# Altium PCB UI_PCB.PcbDoc (part 3 of 5)
Units mm, origin at the board's own origin, x right, y up, seen from the top; angles counter-clockwise.
Board outline 164.97 x 129.99 mm, 4 copper layers (SIG/PWR1, GND1, GNS2, SIG/PWR2), stack 1.18 mm thick; 237 components, 216 nets, 913 pads, 655 vias.
Unrouted connection lines stored in the file: 177.
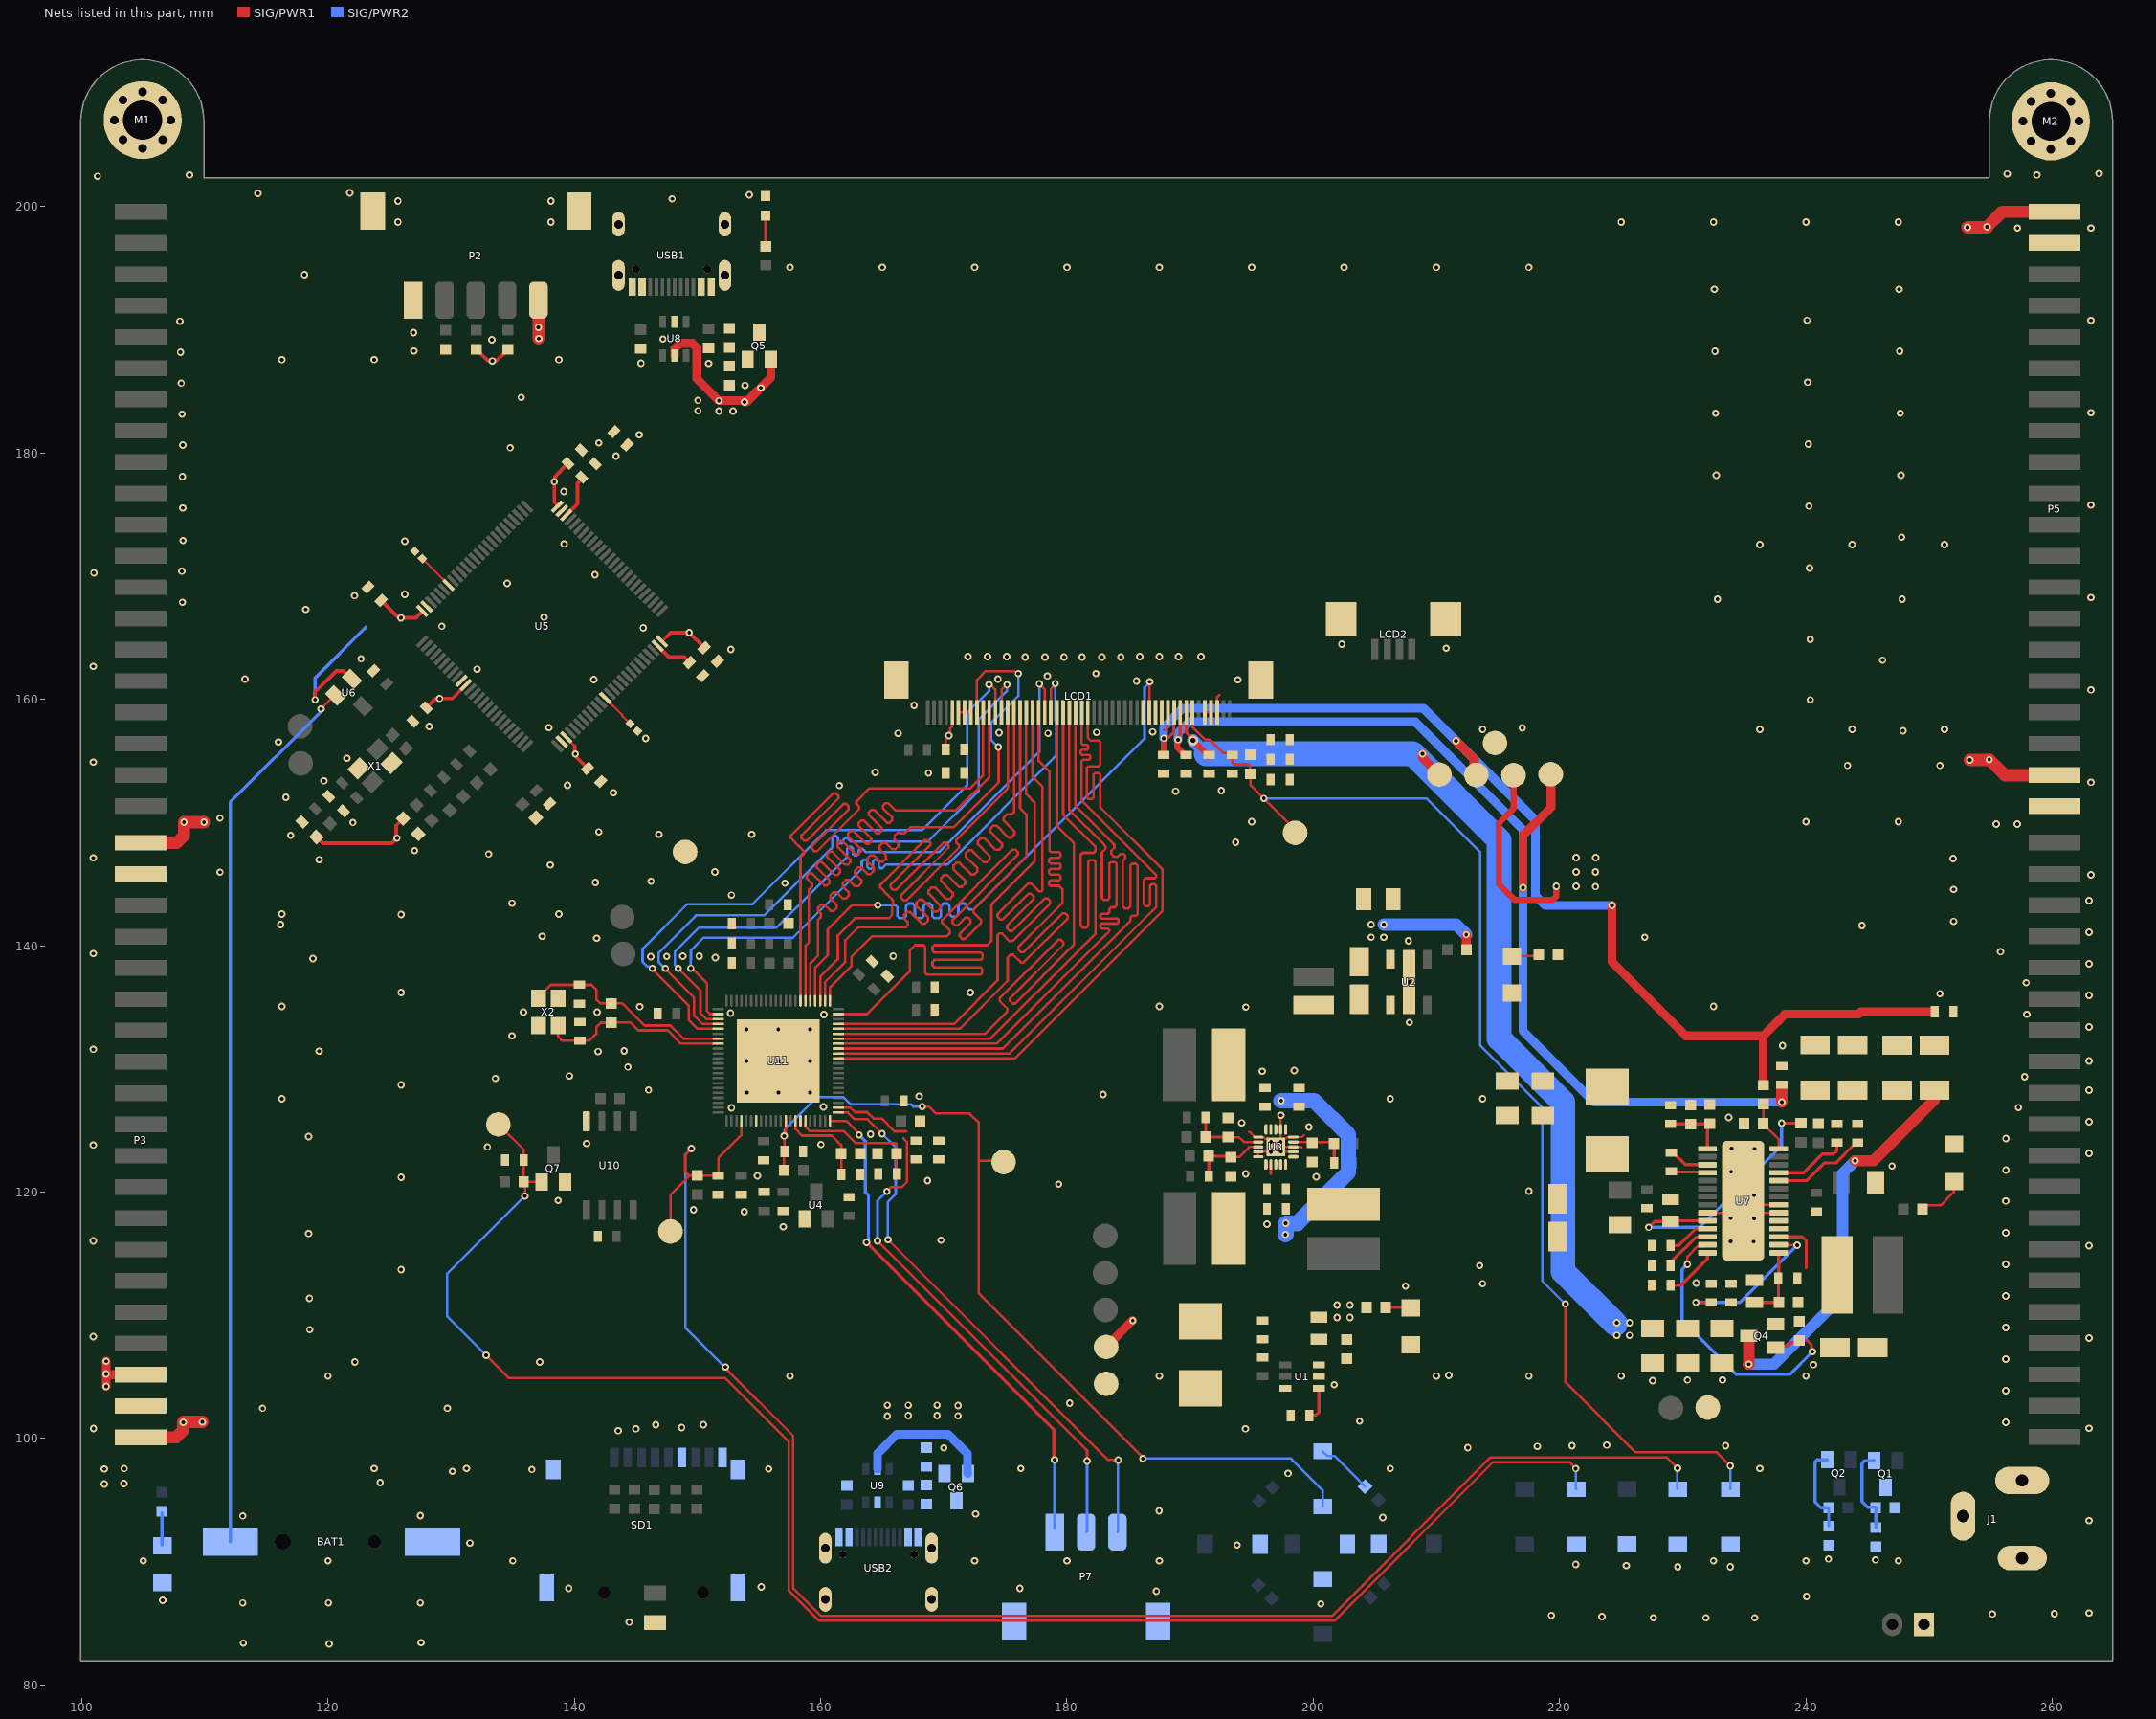
[diagram p4: the nets of this part, all layers, seen from the top]

## Via types
v1: diameter 0.6, hole 0.3, SIG/PWR1 to SIG/PWR2, tented both sides, 644 vias
v2: diameter 0.6, hole 0.3, SIG/PWR1 to SIG/PWR2, tented bottom, 10 vias
v3: diameter 0.8, hole 0.4, SIG/PWR1 to SIG/PWR2, tented both sides, 1 vias

## Nets (pads, with @x,y where several pads share a name; then routed paths per layer and width w, separated by ;. In a path a pad name is that pad's centre, name@x,y a point inside that pad or via, vN(x,y) a via of type N, cw(c..) or ccw(c..) an arc to the next point about the centre after c; other vN are vias at no path point) (continued)
"3V3 LCD": C14.2 C15.2 C16.2 C17.2 C18.2 C19.2 C45.2 C48.2 C49.2 C54.2 C55.2 C56.2 C57.2 C58.2 L7.2 LCD1.6 LCD1.7 LCD1.8 LCD1.39 LCD1.46 LCD1.47 P2.5 P3.01 P3.20 P5.02 P5.20 R14.1 R16.1 R20.2 R22.1 R29.1 R37.2 R40.2 TP10.1 U5.11 U5.28 U5.50 U5.75 U5.100 U6.1 | length 91.7
  SIG/PWR1 w0.2: U5.28@139.333,156.923 140.034,156.222 ; U5.50@147.111,164.701 147.511,165.1 ; LCD1.6@171.192,158.953 LCD1.7@171.692,158.953 LCD1.8@172.192,158.953 ; LCD1.46@191.192,158.953 LCD1.47@191.692,158.953
  SIG/PWR1 w0.254: v1(129.057,160.07) 130.098,160.07 U5.11@131.193,161.165
  SIG/PWR1 w0.308: R20.2@118.839,149.004 118.934,149.004 119.602,148.336 125.197,148.336 v1(125.603,148.742) 125.552,148.793 125.552,149.784 R22.1@126.096,150.328 ; v1(118.948,159.969) 118.948,160.604 120.675,162.331 121.211,162.331 121.87,161.673 U6.1@121.941,161.673 ; C18.2@124.313,168.041 125.674,166.68 125.859,166.68 v1(125.915,166.624) 127.114,166.624 U5.100@127.666,167.176 ; C14.2@127.971,159.314 127.996,159.314 128.696,160.014 129.002,160.014 v1(129.057,160.07) ; U5.11@131.197,161.165 U5.11@131.201,161.165 ; R14.1@132.055,188.417 132.08,188.417 132.351,188.146 132.351,188.121 132.941,187.53 133.297,187.53 v1(133.35,187.477) 133.406,187.533 133.711,187.533 134.299,188.121 134.299,188.146 134.57,188.417 R16.1@134.595,188.417 ; P2.5@137.084,192.411 P2.5@137.096,192.398 ; v1@137.096,189.309 v1(137.109,189.296) ; U5.75@138.626,175.661 138.681,175.716 138.681,175.724 138.373,176.032 v1(138.373,177.673) 138.416,177.717 138.416,178.091 C17.2@139.491,179.166 ; v1@140.034,155.622 140.034,156.222 ; v1(140.081,155.575) 140.137,155.519 140.137,155.341 C15.2@141.066,154.412 ; 147.511,165.1 147.841,165.43 v1(149.327,165.43) 149.327,165.417 150.54,164.204 C16.2@150.54,164.191 ; P5.02@260.172,153.848 P5.02@260.198,153.873
  SIG/PWR1 w0.512: TP10.1@216.256,153.848 216.256,151.13 215.062,149.936 215.062,145.009 216.332,143.739 219.435,143.739 219.735,144.039 v1(219.735,144.831)
  SIG/PWR1 w1: P3.20@104.8,100.101 107.669,100.101 108.255,100.687 v1(108.255,101.321) ; P3.01@104.8,148.361 107.72,148.361 108.306,148.947 v1(108.306,150.038) v1(109.931,150.038) ; v1@108.255,101.346 v1(109.804,101.346) ; v1@137.096,189.309 P2.5@137.096,192.398 ; v1(253.111,198.323) v1@254.711,198.323 ; v1(253.314,155.092) v1@254.889,155.092 ; v1(254.711,198.374) 255.93,199.593 P5.20@260.198,199.593 ; v1(254.889,155.118) 256.159,153.848 P5.02@260.172,153.848
  SIG/PWR2 w0.308: v1(118.948,159.969) 118.948,161.747 123.068,165.867
  other v1: 222.91,144.805 221.336,144.831 221.336,145.999 222.91,145.999 221.336,147.168 222.936,147.168 176.606,163.449 178.206,163.449 179.756,163.449 181.229,163.449 182.829,163.449 184.379,163.449 171.958,163.474 173.558,163.474 175.108,163.474 185.903,163.474 187.503,163.474 189.052,163.474 190.881,163.474 143.383,179.756 145.263,181.483 137.084,190.211
5V: C2.2 C6.2 C10.2 C11.2 C13.2 L1.2 P3.18 Q5.2 Q6.2 R1.2 R28.1 TP6.1 U3.7 U3.8 U3.9 U3.10 U3.16 U3.18 U3.19 U8.5 U9.5 | length 51.8
  SIG/PWR1 w0.198: 196.552,121.482 U3.7@196.552,122.248
  SIG/PWR1 w0.712: v1(101.981,104.242) v1(101.981,105.245) ; v1(101.981,106.274) v1(101.981,105.245) ; P3.18@104.8,105.181 102.044,105.181 v1(101.981,105.245) ; U8.5@148.133,187.916 148.133,188.449 148.594,188.911 149.572,188.911 149.945,188.537 149.945,186.046 v1(151.74,184.252) 153.721,184.252 v1(153.822,184.15) 153.975,184.15 155.948,186.123 155.948,187.604 Q5.2@155.966,187.622 ; TP6.1@183.185,107.442 v1@185.318,109.576
  SIG/PWR2 w0.712: U9.5@164.617,97.53 164.617,98.781 166.192,100.355 170.332,100.355 171.926,98.762 171.926,97.205 Q6.2@171.968,97.163
  SIG/PWR2 w1.27: v1(197.383,127.432) 200.076,127.432 202.844,124.663 202.844,121.615 198.704,117.475 v1(197.764,117.475) 197.764,116.586 v1(197.739,116.561)
  other v1: 101.829,96.317 103.429,96.342 101.829,97.536 103.454,97.561 165.415,101.821 171.155,101.846 167.117,101.872 169.454,101.872 171.155,102.684 165.415,102.71 167.117,102.71 169.454,102.71 185.344,109.576 201.93,109.83 202.971,109.83 201.93,110.846 202.971,110.846 151.74,183.413 152.883,183.413 150.038,183.439 150.038,184.277 155.143,185.293
9V: J1.1 Q1.3 R2.2
10.4V: C3.2 C32.2 C33.2 C34.2 C51.2 D1.1 D4.2 LCD1.43 Q4.3 R5.2 TP8.1 U2.5 | length 118.3
  SIG/PWR1 w0.254: LCD1.43@189.692,158.953 189.692,157.323 190.236,156.779 v3(190.236,156.668)
  SIG/PWR1 w0.508: v3(190.236,156.668) 190.241,156.668 191.406,155.503 C51.2@191.406,155.499
  SIG/PWR1 w0.712: C51.2@191.406,155.499 C51.2@191.541,155.499 ; v1(208.864,155.6) 208.864,155.27 TP8.1@210.236,153.899 ; v1(212.42,140.919) 212.42,139.7 R5.2@212.446,139.675
  SIG/PWR1 w0.912: Q4.3@235.349,108.331 235.356,108.323 v1(235.356,106.045) ; v1(243.992,122.555) 245.493,122.555 250.394,127.457
  SIG/PWR2 w0.912: v1(235.356,106.045) 237.414,106.045 242.976,111.608 242.976,121.539 v1(243.992,122.555)
  SIG/PWR2 w1: v3(190.236,156.668) 191.304,155.6 ; v1(205.715,141.732) 211.607,141.732 v1(212.42,140.919)
  SIG/PWR2 w2: 191.304,155.6 208.077,155.6 215.087,148.59 215.087,132.486 220.269,127.305 220.269,113.563 v1@224.536,109.296
  other v1: 224.638,108.382 225.679,108.382 224.638,109.398 225.679,109.398 204.699,140.691 205.715,140.691 204.699,141.732
16V: C40.2 C52.2 D6.1 LCD1.41 R33.2 TP9.1 | length 93.7
  SIG/PWR1 w0.254: v1(187.858,156.845) 187.925,156.911 188.229,156.911 188.669,157.351 188.669,158.08 188.692,158.103 LCD1.41@188.692,158.953
  SIG/PWR1 w0.508: C52.2@187.858,155.499 v1(187.858,156.845)
  SIG/PWR1 w0.712: v1(211.582,156.642) 213.042,155.182 213.042,154.065 TP9.1@213.233,153.873 ; v1(224.257,143.281) 224.257,138.684 230.251,132.69 236.537,132.69 ; R33.2@236.537,128.689 236.537,132.69 ; C40.2@250.445,134.645 244.456,134.645 244.257,134.446 238.294,134.446 237.65,133.803 237.646,133.803 237.113,133.27 237.113,133.266 236.537,132.69
  SIG/PWR2 w0.712: v1(187.858,156.845) 187.858,157.759 189.382,159.283 208.94,159.283 v1(211.582,156.642) 218.035,150.189 218.035,144.078 218.832,143.281 v1(224.257,143.281)
-7V: C41.1 C53.2 D5.2 LCD1.42 R34.2 TP11.1 | length 87.5
  SIG/PWR1 w0.254: v1(189.013,156.732) 189.079,156.798 189.079,157.067 189.192,157.18 LCD1.42@189.192,158.953
  SIG/PWR1 w0.508: v1(189.013,156.732) 189.013,156.707 188.943,156.637 188.943,156.112 189.48,155.575 189.532,155.575 C53.2@189.582,155.525
  SIG/PWR1 w0.712: v1(217.018,144.729) 217.018,148.946 219.304,151.232 TP11.1@219.304,153.924
  SIG/PWR1 w0.912: v1(238.049,127.305) C41.1@238.049,128.498
  SIG/PWR2 w0.712: v1@189.009,156.732 189.009,157.259 189.941,158.191 208.276,158.191 217.018,149.45 v1(217.018,144.729) 217.018,133.096 222.809,127.305 v1(238.049,127.305)
B0: LCD1.12 U11.49 | length 53.5
  SIG/PWR1 w0.2: v1(146.329,138.164) 146.329,138.1 149.276,135.153 149.276,133.985 150.001,133.259 U11.49@151.688,133.259 ; v1(173.668,161.206) 173.772,161.206 174.144,160.834 174.192,160.834 LCD1.12@174.192,158.953
  SIG/PWR2 w0.2: v1(146.329,138.164) 146.221,138.164 146.076,138.309 145.925,138.309 145.542,138.693 145.542,139.751 149.174,143.383 154.457,143.383 160.458,149.384 168.231,149.384 171.907,153.06 171.907,158.953 173.69,160.736 173.69,161.184 v1(173.668,161.206)
B1: LCD1.13 U11.48 | length 53.5
  SIG/PWR1 w0.2: v1(147.396,138.164) 147.396,138.125 149.733,135.788 149.733,134.344 150.418,133.659 U11.48@151.688,133.659 ; LCD1.13@174.693,158.877 174.693,160.793 175.101,161.2 v1(175.121,161.2)
  SIG/PWR2 w0.2: v1(147.396,138.164) 147.357,138.164 146.85,138.671 146.85,139.433 149.885,142.469 155.423,142.469 160.846,147.892 160.946,147.992 160.946,148.773 161.083,148.909 161.264,148.909 161.4,148.773 161.4,148.446 161.537,148.31 161.718,148.31 161.854,148.446 161.854,148.599 161.991,148.735 162.172,148.735 162.308,148.599 162.445,148.463 164.547,148.463 164.821,148.463 164.973,148.463 168.707,148.463 172.847,152.603 172.847,158.394 175.124,160.672 175.124,161.197 v1(175.121,161.2)
B2: LCD1.14 U11.25 | length 56.3
  SIG/PWR1 w0.2: U11.25@159.963,135.534 159.963,137.484 161.392,138.913 161.392,140.843 162.789,142.24 165.532,142.24 165.811,142.519 165.811,143.383 165.824,143.396 165.895,143.466 165.895,143.679 165.576,143.997 165.47,144.103 164.834,144.739 164.834,144.951 168.478,148.595 168.69,148.595 168.902,148.383 168.902,148.171 165.682,144.951 165.682,144.739 165.895,144.527 166.107,144.527 169.963,148.383 170.175,148.383 170.387,148.171 170.387,147.959 166.531,144.103 166.531,143.891 166.743,143.679 166.955,143.679 171.236,147.959 171.236,148.171 171.024,148.383 171.024,148.595 171.094,148.666 175.192,152.764 LCD1.14@175.192,158.953
B3: LCD1.15 U11.24 | length 56.4
  SIG/PWR1 w0.2: U11.24@160.363,135.534 160.363,137.049 162.001,138.688 162.001,140.462 163.043,141.503 166.758,141.503 166.9,141.503 167.077,141.68 167.077,141.931 166.764,142.243 166.764,142.494 167.014,142.744 167.265,142.744 168.22,141.788 168.471,141.788 168.721,142.039 168.721,142.289 167.765,143.244 167.765,143.495 168.016,143.745 168.266,143.745 169.221,142.79 169.472,142.79 169.722,143.04 169.722,143.29 168.767,144.246 168.767,144.496 169.017,144.746 169.267,144.746 170.223,143.791 170.473,143.791 170.723,144.041 170.723,144.291 169.768,145.247 169.768,145.497 170.018,145.748 170.268,145.748 171.224,144.792 171.474,144.792 171.725,145.042 171.725,145.293 170.769,146.248 170.769,146.498 171.019,146.749 171.27,146.749 172.225,145.793 172.475,145.793 172.726,146.044 172.726,146.294 171.77,147.249 171.77,147.5 172.021,147.75 172.271,147.75 173.226,146.794 173.477,146.794 173.727,147.045 173.727,147.295 172.771,148.251 172.771,148.501 173.022,148.751 173.272,148.751 174.228,147.796 174.478,147.796 174.728,148.046 174.728,148.296 173.773,149.252 173.773,149.502 174.023,149.752 174.273,149.752 175.229,148.797 175.479,148.797 175.73,149.047 175.73,149.298 174.862,150.165 174.862,150.415 175.112,150.666 175.515,150.666 175.692,150.843 175.692,151.099 LCD1.15@175.692,158.953
B4: LCD1.16 U11.23 | length 56.3
  SIG/PWR1 w0.2: U11.23@160.763,135.534 160.763,136.639 162.484,138.361 162.484,139.09 164.16,140.767 170.231,140.767 170.421,140.957 170.492,141.028 170.492,141.24 169.856,141.876 169.856,142.089 175.587,147.82 175.799,147.82 176.011,147.608 176.011,147.395 170.704,142.089 170.704,141.876 170.916,141.664 171.128,141.664 171.765,142.301 171.977,142.301 172.189,142.089 172.189,141.877 171.296,140.984 171.296,140.772 171.509,140.56 171.721,140.56 173.037,141.877 173.037,142.089 172.401,142.725 172.401,142.937 176.436,146.972 176.613,147.149 176.733,147.269 176.733,150.622 176.192,151.163 LCD1.16@176.192,158.953
B5: LCD1.17 U11.21 | length 56.3
  SIG/PWR1 w0.2: U11.21@161.438,134.459 163.771,134.459 167.234,137.922 167.234,139.624 167.665,140.056 168.235,140.056 168.335,140.056 168.485,139.906 168.485,137.806 168.635,137.656 172.963,137.656 173.113,137.806 173.113,138.106 172.963,138.256 169.235,138.256 169.085,138.406 169.085,138.706 169.235,138.856 173.007,138.856 173.157,139.006 173.157,139.306 173.007,139.456 169.235,139.456 169.085,139.606 169.085,139.906 169.235,140.056 173.257,140.056 173.533,140.056 173.863,140.386 173.863,143.358 177.368,146.863 177.368,151.638 176.692,152.314 LCD1.17@176.692,158.953
B6: LCD1.18 U11.19 | length 56.3
  SIG/PWR1 w0.2: U11.19@161.438,133.659 170.82,133.659 174.371,137.211 174.371,140.868 174.438,140.935 174.509,141.006 174.721,141.006 175.357,140.37 175.569,140.37 178.632,143.432 178.632,143.644 178.42,143.856 178.208,143.856 175.569,141.218 175.357,141.218 175.145,141.43 175.145,141.643 177.296,143.794 177.296,144.006 177.084,144.218 176.872,144.218 174.791,142.137 174.579,142.137 174.367,142.349 174.367,142.561 176.872,145.066 177.084,145.066 177.72,144.43 177.932,144.43 178.003,144.501 178.003,152.908 177.192,153.719 LCD1.18@177.192,158.953
B7: LCD1.19 U11.18 | length 56.3
  SIG/PWR1 w0.2: U11.18@161.438,133.259 171.283,133.259 175.184,137.16 175.184,139.04 175.349,139.205 175.42,139.275 175.632,139.275 176.268,138.639 176.48,138.639 180.065,142.223 180.065,142.435 179.852,142.648 179.64,142.648 176.48,139.488 176.268,139.488 176.056,139.7 176.056,139.912 179.363,143.219 179.54,143.396 179.629,143.485 179.629,144.602 179.46,144.771 179.36,144.871 178.666,144.871 178.552,144.985 178.552,145.212 178.666,145.325 179.364,145.325 179.478,145.439 179.478,145.666 179.364,145.779 178.666,145.779 178.552,145.893 178.552,146.12 178.666,146.233 179.364,146.233 179.478,146.347 179.478,146.574 179.364,146.687 178.666,146.687 178.552,146.801 178.552,147.028 178.666,147.141 179.36,147.141 179.474,147.255 179.474,147.482 179.36,147.595 178.705,147.595 178.587,147.712 178.587,148.398 178.587,154.102 177.692,154.997 LCD1.19@177.692,158.953
F1C_OSC_IN: C71.2 R58.2 U11.51 X2.1 | length 17.4
  SIG/PWR1 w0.2: X2.1@137.091,135.735 137.091,135.835 138.085,136.83 C71.2@140.411,136.83 141.402,136.83 141.783,136.449 141.783,135.661 142.125,135.319 R58.2@143.002,135.319 143.903,135.319 145.694,133.528 147.803,133.528 148.871,132.459 U11.51@151.688,132.459
F1C_OSC_OUT: C77.2 R58.1 U11.52 X2.3 | length 15.7
  SIG/PWR1 w0.2: X2.3@138.691,133.535 138.691,132.582 138.963,132.309 C77.2@140.462,132.309 141.224,132.309 141.783,132.867 141.783,133.392 142.15,133.759 142.992,133.759 R58.1@143.002,133.769 144.564,133.769 145.193,133.14 147.586,133.14 148.667,132.059 U11.52@151.688,132.059
F1C_RST: C78.2 R59.1 SW5.2 TP24.1 U11.70 | length 135
  SIG/PWR1 w0.2: TP24.1@147.803,116.815 147.803,119.786 149.352,121.336 ; v1(149.504,123.546) 148.996,123.038 148.996,121.666 149.301,121.361 R59.1@149.987,121.361 ; R59.1@149.987,121.336 C78.2@151.689,121.336 151.689,122.758 153.563,124.632 U11.70@153.563,125.784 ; v1(152.267,105.81) 152.267,105.721 157.776,100.212 157.776,87.839 160.023,85.592 201.517,85.592 214.392,98.466 228.686,98.466 v1(229.565,97.587)
  SIG/PWR2 w0.2: v1(149.504,123.546) 149.022,123.063 149.022,108.966 152.178,105.81 v1(152.267,105.81) ; v1(229.565,97.587) 229.565,95.91 SW5.2@229.591,95.885
G0: LCD1.20 U11.47 | length 53.5
  SIG/PWR1 w0.2: v1(148.438,138.164) 148.438,138.151 150.241,136.347 150.241,134.544 150.725,134.059 U11.47@151.688,134.059 ; v1(177.761,161.265) 178.192,160.834 LCD1.20@178.192,158.877
  SIG/PWR2 w0.2: v1(148.438,138.164) 148.438,138.188 148.158,138.468 148.158,139.522 150.114,141.478 156.413,141.478 162.065,147.13 162.165,147.23 162.165,147.889 162.302,148.025 162.483,148.025 162.619,147.889 162.619,147.476 162.756,147.34 162.937,147.34 163.073,147.476 163.073,147.761 163.21,147.897 163.391,147.897 163.527,147.761 163.664,147.625 167.043,147.625 169.647,147.625 177.761,155.74 v1(177.761,161.265)
G1: LCD1.21 U11.46 | length 53.5
  SIG/PWR1 w0.2: v1(149.454,138.176) 149.555,138.176 150.774,136.957 150.774,134.696 151.011,134.459 U11.46@151.688,134.459 ; LCD1.21@178.693,158.877 178.693,160.83 179.045,161.182 v1(179.045,161.29)
  SIG/PWR2 w0.2: v1(149.454,138.176) 149.454,138.883 149.466,138.896 149.466,139.636 150.495,140.665 157.759,140.665 163.237,146.142 163.337,146.242 163.337,146.847 163.473,146.983 163.654,146.983 163.791,146.847 163.791,146.4 163.927,146.264 164.108,146.264 164.245,146.4 164.245,146.847 164.381,146.983 164.562,146.983 164.699,146.847 164.699,146.445 164.835,146.309 165.016,146.309 165.153,146.445 165.153,146.447 165.289,146.583 169.12,146.583 170.282,146.583 179.124,155.426 179.124,158.264 179.045,158.344 v1(179.045,161.29)
G2: LCD1.22 U11.17 | length 56.3
  SIG/PWR1 w0.2: U11.17@161.438,132.859 173.347,132.859 175.095,134.607 175.166,134.678 175.166,134.89 174.529,135.527 174.529,135.739 179.287,140.496 179.499,140.496 179.711,140.284 179.711,140.072 175.378,135.739 175.378,135.527 175.59,135.314 175.802,135.314 180.252,139.765 180.429,139.941 180.569,140.081 180.569,148.336 179.192,149.712 LCD1.22@179.192,158.953
G3: LCD1.23 U11.16 | length 56.3
  SIG/PWR1 w0.2: U11.16@161.438,132.459 173.252,132.459 173.254,132.461 173.787,132.461 181.192,139.866 181.369,140.043 181.475,140.149 182.321,140.995 182.321,146.803 182.171,146.953 181.871,146.953 181.721,146.803 181.721,141.642 181.571,141.492 181.271,141.492 181.121,141.642 181.121,147.403 181.271,147.553 182.171,147.553 182.321,147.703 182.321,147.803 182.321,148.006 179.692,150.635 LCD1.23@179.692,158.953
G4: LCD1.24 U11.15 | length 56.2
  SIG/PWR1 w0.2: U11.15@161.438,132.059 174.3,132.059 183.058,140.818 183.07,140.818 183.439,141.186 183.439,141.286 183.322,141.403 182.819,141.403 182.719,141.503 182.719,141.703 182.819,141.803 184.081,141.803 184.181,141.903 184.181,142.103 184.081,142.203 182.819,142.203 182.719,142.303 182.719,142.503 182.819,142.603 183.322,142.603 183.439,142.721 183.439,142.869 183.439,142.872 183.439,142.972 183.589,143.122 183.889,143.122 184.039,143.272 184.039,146.66 183.889,146.81 183.589,146.81 183.439,146.66 183.439,143.872 183.289,143.722 182.989,143.722 182.839,143.872 182.839,147.419 182.839,147.586 183.129,147.875 183.129,148.087 183.058,148.158 180.192,151.024 LCD1.24@180.192,158.953
G5: LCD1.25 U11.14 | length 56.2
  SIG/PWR1 w0.2: U11.14@161.438,131.659 174.789,131.659 185.141,142.011 185.141,142.188 185.141,142.288 185.291,142.438 185.591,142.438 185.741,142.588 185.741,146.509 185.591,146.659 185.291,146.659 185.141,146.509 185.141,143.188 184.991,143.038 184.691,143.038 184.541,143.188 184.541,146.665 184.526,146.68 184.526,146.892 184.738,147.104 184.738,147.317 184.667,147.387 184.596,147.458 184.346,147.458 184.096,147.208 183.846,147.208 183.595,147.458 183.595,147.708 183.845,147.959 183.845,148.209 183.833,148.221 183.762,148.292 180.692,151.362 LCD1.25@180.692,158.953
G6: LCD1.26 U11.13 | length 56.3
  SIG/PWR1 w0.2: U11.13@161.438,131.259 175.354,131.259 186.703,142.608 186.862,142.767 186.95,142.856 187.249,143.154 187.249,144.87 187.124,144.995 186.874,144.995 186.749,144.87 186.749,143.361 186.597,143.209 186.42,143.209 186.243,143.386 186.243,143.563 186.249,143.569 186.249,145.37 186.374,145.495 187.124,145.495 187.249,145.62 187.249,145.72 181.192,151.776 181.192,152.891 181.192,154.991 181.31,155.108 181.8,155.108 181.9,155.208 181.9,155.408 181.8,155.508 181.21,155.508 181.11,155.608 181.11,155.808 181.21,155.908 181.633,155.908 181.733,156.008 181.733,156.208 181.633,156.308 181.31,156.308 181.192,156.425 181.192,156.699 LCD1.26@181.192,158.953
G7: LCD1.27 U11.12 | length 56.3
  SIG/PWR1 w0.2: U11.12@161.438,130.859 175.767,130.859 187.757,142.85 187.757,146.202 182.702,151.257 182.702,151.282 182.702,151.654 182.702,153.897 182.566,154.033 182.294,154.033 182.158,153.897 182.158,152.053 182.022,151.917 181.75,151.917 181.614,152.053 181.614,154.441 181.75,154.577 182.566,154.577 182.702,154.713 ; LCD1.27@181.692,158.953 181.692,156.89 181.915,156.667 182.585,156.667 182.702,156.55 182.702,154.713 ; 182.702,154.813 182.702,154.713
GND: BAT1.N C2.1 C3.1 C4.2 C6.1 C7.1 C9.1 C10.1 C11.1 C13.1 C14.1 C15.1 C16.1 C17.1 C18.1 C19.1 C20.2 C21.2 C22.1 C23.1 C24.1 C27.1 C28.1 C29.1 C30.1 C32.1 C33.1 C34.1 C35.1 C36.1 C37.1 C40.1 C41.2 C43.1 C44.1 C46.1 C47.1 C48.1 C49.1 C50.2 C51.1 C52.1 C53.1 C54.1 C55.1 C56.1 C57.1 C58.1 C60.1 C61.1 C62.1 C63.1 C64.1 C65.1 C66.1 C67.1 C68.1 C69.1 C70.1 C71.1 C72.1 C73.1 C74.1 C75.1 C76.1 C77.1 C78.1 C80.1 C81.1 C82.1 C83.1 C84.1 C85.1 D2.1 D7.1 D8.2 D9.1 D10.1 D11.1 D12.1 J1.2 LCD1.5 LCD1.36 LCD1.38 LCD1.40 LCD1.48 LCD1.51 LCD1.52 LCD2.S1 LCD2.S2 M1.G M2.G P2.1 P2.6 P3.02 P3.19 P5.01 P5.19 P7.4 Q7.2 R4.1 R6.1 R7.1 R9.1 R11.1 R13.1 R15.1 R18.1 R21.2 R25.1 R27.1 R32.1 R35.1 R38.1 R42.2 R43.2 R44.2 R51.2 R52.2 R53.2 R56.1 R57.1 R63.1 R69.2 SD1.6 SD1.9 SW1.1 SW3.1 SW4.1 SW5.1 SW10.1 TP12.1 TP13.1 TP15.1 TP16.1 U1.2 U2.2 U3.1 U3.4 U3.5 U3.12 U3.13 U3.15 U3.17 U3.21 U4.1 U5.10 U5.27 U5.74 U5.99 U7.6 U7.7 U7.23 U7.28@234.898,119.306 U8.2 U9.2 U10.4 U11.73 U11.82 U11.89 USB1.A1 USB1.B1 USB1.SHIELD USB2.A1 USB2.B1 USB2.SHIELD X1.2 X1.4 X2.2 X2.4 | length 33.2
  SIG/PWR1 w0.17: U3.1@195.527,124.473 U3.1@195.527,124.473 195.542,124.458 195.972,124.458 196.094,124.336 U3.21@196.289,124.336 ; v1(197.352,124.073) 197.627,124.348 197.773,124.348 197.884,124.459 198.363,124.459 U3.15@198.377,124.473 199.08,124.473 199.248,124.641
  SIG/PWR1 w0.198: C18.1@123.235,169.119 C18.1@123.328,169.211 ; U5.74@138.97,175.307 U5.74@138.98,175.307 ; U5.27@138.98,156.569 U5.27@138.98,156.61 ; C57.1@170.155,155.956 170.155,156.714 170.409,156.968 v1(170.409,157.074) 170.486,157.151 170.486,157.608 170.675,157.797 170.675,158.935 LCD1.5@170.692,158.953 ; 187.884,157.505 187.96,157.505 188.192,157.738 LCD1.40@188.192,158.953 ; LCD1.48@192.192,158.953 192.192,160.188 192.354,160.35 ; 194.767,124.892 194.832,124.892 195.252,124.473 U3.1@195.527,124.473 ; U3.5@195.527,122.873 U3.4@195.527,123.273 v1(196.552,123.273) ; U3.1@195.527,124.473 U3.1@195.899,124.472 ; U3.21@197.352,123.673 U3.13@198.377,123.673 199.029,123.673 199.058,123.644 ; v1(197.352,124.073) 197.352,124.657 ; U3.17@197.352,125.098 197.353,125.099 197.353,126.223 v1(197.373,126.243) ; 197.352,125.885 197.351,125.884 197.351,124.173 197.104,123.927 197.351,123.679 197.351,123.524 197.603,123.273 U3.12@198.377,123.273 ; U7.23@231.998,118.331 233.923,118.331 U7.28@234.898,119.306 U7.28@235.223,118.981 ; U7.6@237.798,118.331 235.873,118.331 U7.28@235.223,118.981 ; U7.7@237.798,118.981 U7.28@235.223,118.981
  SIG/PWR1 w0.2: C73.1@155.372,122.606 C73.1@155.397,122.58
  SIG/PWR1 w0.254: v1@137.919,157.671 v1(137.919,157.712)
  SIG/PWR2 w0.2: SW10.1@200.762,98.958 201.122,98.598 201.706,98.598 R69.2@204.201,96.103
  other v1: 120.091,83.337 113.125,83.397 127.551,83.431 144.45,85.09 227.609,85.446 231.877,85.446 235.839,85.446 223.444,85.547 219.329,85.649 255.143,85.75 260.172,85.787 262.992,85.838 200.618,86.582 113.074,86.662 120.04,86.662 127.5,86.662 106.578,86.868 240.051,87.181 187.256,87.614 139.548,87.833 176.174,87.833 155.169,87.96 229.591,89.586 233.858,89.586 225.425,89.687 221.31,89.789 105,90.076 120,90.076 135,90.076 172.5,90.076 180,90.076 187.5,90.076 232.5,90.076 240,90.076 247.5,90.076 245.643,90.145 241.833,90.221 193.811,91.357 131.521,91.516 262.992,93.338 205.648,93.592 113.074,93.717 127.5,93.75 172.586,93.878 187.477,94.132 124.231,96.418 197.951,97.173 130.099,97.333 136.55,97.485 155.778,97.536 123.75,97.576 131.25,97.576 176.25,97.576 206.25,97.576 236.25,97.576 170.002,99.238 212.547,99.263 218.186,99.365 221.005,99.416 233.477,99.416 223.825,99.466 143.561,100.635 145,100.787 194.488,100.787 100.965,100.813 262.992,100.838 148.717,100.889 146.609,101.117 150.47,101.117 256.228,101.321 203.759,101.422 114.683,102.459 129.683,102.459 180.213,102.87 256.228,103.886 201.694,104.369 227.559,104.699 230.378,104.75 233.223,104.75 120,105.076 157.5,105.076 187.5,105.076 210,105.076 217.5,105.076 225,105.076 240,105.076 210.998,105.131 240.614,105.994 122.183,106.209 137.183,106.209 256.228,106.451 262.992,108.151 100.94,108.28 118.516,108.839 256.228,109.017 118.491,111.379 256.228,111.582 207.493,112.37 213.75,112.576 231.089,112.624 125.933,113.709 213.512,114.046 256.228,114.148 262.992,115.651 235.757,115.988 233.874,116.008 100.94,116.053 169.774,116.102 118.433,116.637 256.228,116.713 156.972,117.196 196.24,117.399 233.895,117.892 235.778,117.871 153.797,118.415 149.676,118.567 256.228,119.278 138.684,119.329 235.798,119.754 217.5,120.076 179.324,120.65 168.681,120.941 125.933,121.209 200.245,121.243 154.864,121.336 194.513,121.488 233.936,121.658 256.235,121.793 246.99,122.123 262.992,123.151 197.358,123.292 235.84,123.52 233.957,123.541 132.944,123.673 100.94,123.825 160.019,123.877 140.995,123.952 196.571,124.079 256.235,124.358 118.433,124.511 164.059,124.714 199.644,125.298 194.183,125.628 262.992,125.716 233.731,126.06 152.756,126.848 257.251,126.873 160.223,126.924 116.25,127.576 206.25,127.576 213.75,127.576 167.996,127.787 182.931,127.94 262.992,128.281 146.025,128.295 125.933,128.709 133.586,129.235 257.759,129.362 139.598,129.438 195.859,129.819 198.45,129.87 144.348,130.156 262.992,130.651 141.935,131.42 119.278,131.452 144.049,131.465 100.94,131.597 238.1,131.902 134.932,132.69 262.992,133.412 207.797,133.782 160.274,134.417 257.937,134.442 152.679,134.544 135.865,134.62 141.859,134.62 194.52,135.026 145.313,135.052 116.25,135.076 187.5,135.076 232.5,135.076 262.992,135.978 250.876,136.119 172.156,136.2 125.933,136.209 257.886,137.008 262.992,138.543 118.77,138.963 151.447,139.04 146.196,139.116 147.504,139.141 148.812,139.165 150.139,139.167 165.887,139.167 100.94,139.37 255.803,139.522 207.721,140.411 141.808,140.614 226.917,140.691 137.389,140.767 262.992,141.108 244.551,141.649 116.154,141.732 251.993,141.986 125.933,142.545 116.25,142.576 138.75,142.576 134.932,143.459 262.992,143.674 152.756,144.12 251.993,144.577 157.099,145.085 141.707,145.136 146.228,145.237 263.144,145.772 111.227,145.974 151.402,145.999 138.049,146.558 119.278,146.997 251.943,147.091 100.94,147.142 133.045,147.447 127.025,147.726 193.7,148.412 116.967,148.971 146.863,149.047 154.4,149.047 141.986,149.25 255.448,149.885 257.15,149.885 122.022,150.012 195,150.076 240,150.076 247.5,150.076 111.227,150.368 116.58,152.064 143.18,152.425 188.824,152.552 192.532,152.603 161.519,153.01 139.446,153.035 263.144,153.272 119.659,153.391 168.758,154.026 164.414,154.076 243.376,154.635 250.876,154.635 100.94,154.915 121.539,155.219 115.976,156.54 145.796,156.829 166.294,157.251 178.46,157.251 174.492,157.302 182.397,157.328 186.948,157.367 247.886,157.455 213.75,157.576 236.25,157.576 243.75,157.576 251.25,157.576 216.967,157.69 128.219,157.81 167.589,159.512 240.36,159.969 263.144,160.772 185.649,161.493 193.878,161.595 141.58,161.62 113.259,161.646 174.396,161.652 178.41,161.9 182.347,162.103 132.105,162.458 100.94,162.687 246.228,163.195 122.682,163.297 152.705,164.059 210.795,164.164 202.311,164.49 240.353,164.871 145.593,165.811 129.235,165.938 137.541,166.675 118.186,167.31 108.179,167.894 232.816,168.148 247.816,168.148 263.144,168.272 122.149,168.427 126.238,168.529 134.544,169.418 141.681,170.129 100.99,170.282 108.128,170.409 240.291,170.663 236.25,172.576 243.75,172.576 251.25,172.576 139.167,172.618 126.237,172.848 108.229,172.898 247.766,173.177 108.204,175.539 240.24,175.692 263.144,175.772 139.141,176.886 108.179,178.079 232.715,178.206 247.715,178.206 134.791,180.427 108.204,180.645 240.189,180.721 141.986,180.823 108.153,183.159 232.664,183.236 247.664,183.236 263.144,183.272 135.683,184.515 153.848,185.496 108.077,185.674 240.139,185.75 150.901,187.274 145.415,187.3 116.25,187.576 123.75,187.576 138.75,187.576 108.026,188.189 232.613,188.265 247.613,188.265 126.975,188.29 133.299,189.205 147.193,189.255 126.949,189.789 107.975,190.703 240.088,190.779 263.144,190.772 232.562,193.294 247.562,193.294 118.085,194.488 157.5,195.076 165,195.076 172.5,195.076 180,195.076 187.5,195.076 195,195.076 202.5,195.076 210,195.076 217.5,195.076 257.175,198.272 263.144,198.272 125.679,198.755 138.1,198.755 225,198.75 232.5,198.75 240,198.75 247.5,198.75 125.679,200.457 138.1,200.457 147.939,200.638 154.203,200.965 114.3,201.092 121.768,201.117 101.282,202.475 108.75,202.576 258.75,202.576 256.337,202.667 263.804,202.692
  other v2: 153.998,128.089 156.566,128.092 159.133,128.095 153.995,130.656 156.563,130.659 159.13,130.662 153.992,133.224 156.56,133.227 159.127,133.23 207.766,137.049
LCD_RST: C60.2 LCD1.44 R40.1 SW3.2 TP3.1 | length 97.9
  SIG/PWR1 w0.2: LCD1.44@190.192,158.953 190.194,158.952 190.194,157.78 191.242,156.732 191.603,156.732 192.676,155.66 193.26,155.66 C60.2@193.421,155.499 193.421,154.854 193.538,154.737 194.752,154.737 194.869,154.62 R40.1@194.869,153.962 ; R40.1@194.894,153.962 194.894,153.06 v1(195.986,151.968) 198.526,149.428 TP3.1@198.526,149.174 ; v1(220.464,110.93) 220.464,104.58 220.472,104.572 226.162,98.882 232.766,98.882 v1(233.858,97.79)
  SIG/PWR2 w0.2: v1(195.986,151.968) 209.194,151.968 213.563,147.599 213.563,131.902 218.592,126.873 218.592,112.801 v1(220.464,110.93) ; SW3.2@233.858,95.885 v1(233.858,97.79)
LEN: LCD1.9 U11.27 | length 53.5
  SIG/PWR1 w0.2: U11.27@159.163,135.534 159.163,138.589 159.791,139.217 159.791,142.113 159.959,142.281 160.03,142.351 160.03,142.602 159.784,142.847 159.784,143.097 160.035,143.347 160.285,143.347 160.8,142.833 161.05,142.833 161.3,143.083 161.3,143.333 160.786,143.848 160.786,144.098 161.036,144.349 161.286,144.349 161.801,143.834 162.051,143.834 162.302,144.084 162.302,144.334 161.787,144.849 161.787,145.1 162.037,145.35 162.287,145.35 162.802,144.835 163.053,144.835 163.303,145.085 163.303,145.336 162.788,145.851 162.788,146.101 163.038,146.351 163.289,146.351 163.804,145.836 164.054,145.836 164.304,146.087 164.304,146.337 163.789,146.852 163.789,147.102 164.04,147.352 164.29,147.352 164.805,146.838 165.055,146.838 165.305,147.088 165.305,147.338 164.79,147.853 164.79,148.103 165.041,148.354 165.291,148.354 165.806,147.839 166.056,147.839 166.307,148.089 166.307,148.339 165.984,148.662 165.984,148.912 166.234,149.163 166.485,149.163 166.538,149.11 166.788,149.11 167.203,149.525 167.304,149.626 170.809,149.626 174.447,153.264 174.447,156.108 v1(174.422,156.134) ; LCD1.9@172.694,158.928 172.694,161.594 173.406,162.306 175.736,162.306 175.939,162.103 v1(176.047,162.103)
  SIG/PWR2 w0.2: v1(174.422,156.134) 173.838,156.718 173.838,158.064 176.047,160.274 v1(176.047,162.103)
LHSYNC: LCD1.11 U11.28 | length 56.3
  SIG/PWR1 w0.2: U11.28@158.763,135.534 158.763,139.992 159.055,140.284 159.055,144.577 159.233,144.755 159.303,144.825 159.303,145.037 158.867,145.474 158.867,145.686 159.079,145.898 159.291,145.898 160.296,144.893 160.508,144.893 160.721,145.105 160.721,145.317 159.672,146.365 159.672,146.578 159.884,146.79 160.097,146.79 161.145,145.741 161.357,145.741 161.569,145.954 161.569,146.166 160.521,147.214 160.521,147.426 160.733,147.638 160.945,147.638 161.993,146.59 162.205,146.59 162.418,146.802 162.418,147.014 161.369,148.062 161.369,148.275 161.581,148.487 161.794,148.487 162.842,147.438 163.054,147.438 163.266,147.651 163.266,147.863 162.218,148.911 162.218,149.123 162.43,149.335 162.642,149.335 163.69,148.287 163.902,148.287 164.115,148.499 164.115,148.711 163.066,149.759 163.066,149.972 163.278,150.184 163.491,150.184 164.539,149.135 164.751,149.135 164.963,149.348 164.963,149.56 163.915,150.608 163.915,150.82 164.127,151.032 164.339,151.032 165.387,149.984 165.599,149.984 165.812,150.196 165.812,150.408 165.062,151.158 165.062,151.37 165.274,151.582 165.486,151.582 166.065,151.003 166.221,151.003 170.993,151.003 173.692,153.703 LCD1.11@173.692,158.953
LSCK: LCD1.37 U11.26 | length 53.5
  SIG/PWR1 w0.2: U11.26@159.563,135.534 159.563,138.227 160.579,139.243 160.579,141.326 162.56,143.307 v1(164.643,143.307) ; LCD1.37@186.691,158.954 186.704,158.967 186.704,161.431 v1(186.715,161.442)
  SIG/PWR1 w0.254: LCD1.37@186.691,158.954 LCD1.37@186.692,158.953
  SIG/PWR2 w0.2: v1(164.643,143.307) 165.244,143.307 166.052,143.307 166.229,143.13 166.229,142.418 166.406,142.241 166.76,142.241 166.937,142.418 166.937,143.257 167.114,143.434 167.468,143.434 167.645,143.257 167.645,142.418 167.822,142.241 168.176,142.241 168.353,142.418 168.353,143.257 168.53,143.434 168.884,143.434 169.061,143.257 169.061,142.418 169.238,142.241 169.592,142.241 169.769,142.418 169.769,143.257 169.946,143.434 170.3,143.434 170.477,143.257 170.477,142.55 170.654,142.373 171.008,142.373 171.185,142.55 171.185,143.257 171.362,143.434 171.716,143.434 171.893,143.257 171.893,143.137 172.07,142.96 172.424,142.96 172.601,143.137 172.963,143.499 186.294,156.83 186.294,160.96 186.715,161.381 v1(186.715,161.442)
LVSYNC: LCD1.10 U11.29 | length 56.3
  SIG/PWR1 w0.2: U11.29@158.363,135.534 158.363,147.187 158.572,147.396 158.643,147.467 158.643,147.679 158.325,147.997 158.219,148.103 157.582,148.74 157.582,148.952 161.015,152.384 161.227,152.384 161.439,152.172 161.439,151.96 158.431,148.952 158.431,148.74 158.643,148.527 158.855,148.527 161.848,151.52 162.06,151.52 162.272,151.308 162.272,151.096 159.279,148.103 159.279,147.891 159.491,147.679 159.703,147.679 163.121,151.096 163.121,151.308 162.908,151.52 162.908,151.732 162.979,151.803 163.957,152.781 172.136,152.781 173.192,153.838 LCD1.10@173.192,158.953
NetBAT1_P: BAT1.P U6.2 | length 72.3
  SIG/PWR1 w0.2: v1(119.429,159.231) 120.527,160.329 U6.2@120.597,160.329
  SIG/PWR2 w0.254: BAT1.P@112.074,91.618 112.074,151.671 119.363,158.96 119.363,159.165 v1(119.429,159.231)
NetC1_1: C1.1 L1.1 U1.6
NetC1_2: C1.2 U1.1 | length 2.9
  SIG/PWR1 w0.254: C1.2@199.669,101.854 199.724,101.908 200.232,101.908 200.457,102.133 U1.1@200.457,104.089
NetC5_1: C5.1 R8.1 R9.2 U3.14 | length 4.9
  SIG/PWR1 w0.198: U3.14@198.377,124.073 R8.1@201.555,124.073
  SIG/PWR1 w0.254: R8.1@201.555,124.073 R8.1@201.676,123.952 201.701,123.927 C5.1@201.701,122.377
NetC8_1: C8.1 R10.1 R11.2 U3.3 | length 6
  SIG/PWR1 w0.198: R11.2@193.319,122.853 193.973,122.853 194.793,123.673 U3.3@195.527,123.673
  SIG/PWR1 w0.254: C8.1@191.516,121.303 R10.1@191.516,122.929 193.244,122.929 R11.2@193.319,122.853
NetC12_1: C12.1 R12.1 R13.2 U3.2 | length 5.8
  SIG/PWR1 w0.198: R13.2@193.344,124.473 193.967,124.473 194.367,124.073 U3.2@195.527,124.073
  SIG/PWR1 w0.254: R12.1@191.262,124.473 C12.1@191.262,126.06 ; R12.1@191.516,124.473 193.319,124.473 R13.2@193.344,124.473
NetC20_1: C20.1 U5.73 | length 3.6
  SIG/PWR1 w0.308: U5.73@139.333,174.954 139.333,174.962 140.259,175.888 140.259,177.534 140.609,177.884 C20.1@140.609,178.049
NetC21_1: C21.1 U5.49 | length 3.2
  SIG/PWR1 w0.308: U5.49@146.758,164.347 146.766,164.347 147.664,163.449 148.933,163.449 149.347,163.036 C21.1@149.347,162.997
NetC31_1: C31.1 R30.1 R32.2 U7.1 | length 6
  SIG/PWR1 w0.254: R32.2@235.839,111.049 R30.1@237.798,111.049 237.769,111.077 C31.1@237.769,113.005 ; C31.1@237.798,113.005 U7.1@237.798,115.08
NetC31_2: C31.2 C37.2 D3.1 Q4.2 R30.2 R31.2 U7.3 | length 4.5
  SIG/PWR1 w0.254: U7.3@237.798,116.381 239.702,116.381 240.03,116.053 240.03,113.872
NetC38_1: C38.1 D4.1 D6.2
NetC38_2: C38.2 U7.10 | length 7.7
  SIG/PWR1 w0.254: U7.10@237.798,120.931 240.057,120.931 241.497,122.371 242.421,122.371 244.065,124.015 C38.2@244.196,124.015
NetC39_1: C39.1 U7.11 | length 6.1
  SIG/PWR1 w0.254: U7.11@237.798,121.581 239.818,121.581 241.325,123.088 242.24,123.088 242.519,123.368 C39.1@242.519,124.015
NetC39_2: C39.2 D5.1 D7.2
NetC42_1: C42.1 D8.1 L7.1 U7.18 | length 2.9
  SIG/PWR1 w0.254: C42.1@229.138,121.636 231.943,121.636 U7.18@231.998,121.581
NetC42_2: C42.2 U7.17 | length 3.3
  SIG/PWR1 w0.254: C42.2@229.083,123.215 229.214,123.215 230.199,122.23 U7.17@231.998,122.23
NetC43_2: C43.2 U7.25 | length 3.6
  SIG/PWR1 w0.254: C43.2@229.006,115.672 229.687,115.672 231.032,117.017 231.985,117.017 U7.25@231.998,117.03
NetC44_2: C44.2 U7.26 | length 4.1
  SIG/PWR1 w0.254: C44.2@229.006,114.071 229.209,114.274 229.209,114.502 231.053,116.346 231.963,116.346 U7.26@231.998,116.381
NetC45_1: C45.1 R37.1 R38.2 U7.15 | length 5.3
  SIG/PWR1 w0.254: C45.1@229.006,125.539 R37.1@230.657,125.539 R38.2@232.181,125.539 ; U7.15@231.998,123.531 231.998,125.356 R38.2@232.181,125.539 ; R38.2@232.207,125.565 R38.2@232.181,125.539
NetC46_2: C46.2 U7.28@231.998,115.08 | length 4.4
  SIG/PWR1 w0.254: C46.2@229.006,112.446 229.87,112.446 231.998,114.574 U7.28@231.998,115.08
NetC47_2: C47.2 U7.2 | length 12.9
  SIG/PWR1 w0.2: v1(231.059,111.057) 232.3,111.057 C47.2@232.308,111.049 ; U7.2@237.798,115.731 237.814,115.715 239.278,115.715 v1(239.293,115.7)
  SIG/PWR2 w0.254: v1(231.059,111.057) 234.651,111.057 v1(239.293,115.7)
NetC50_1: C50.1 R36.1 U7.24 | length 21.9
  SIG/PWR1 w0.254: v1(227.233,117.145) 227.716,117.627 C50.1@229.006,117.627 229.06,117.681 U7.24@231.998,117.681 ; v1(238.023,125.603) 239.586,125.603 R36.1@239.598,125.591
  SIG/PWR2 w0.254: v1(227.233,117.145) 231.394,117.145 238.023,123.774 v1(238.023,125.603)
NetC62_2: C62.2 C63.2 P7.2 R55.1 U11.2 | length 47
  SIG/PWR1 w0.2: U11.2@161.438,126.859 162.421,126.859 162.789,126.492 163.778,126.492 164.292,125.978 164.954,125.978 ; v1(164.617,116.053) 181.635,99.035 v1(181.635,98.171) ; v1(165.379,120.066) 165.735,120.421 166.599,120.421 167.005,120.828 167.005,124.079 166.726,124.358 ; 165.989,124.943 166.951,124.943
  SIG/PWR1 w0.215: 164.954,125.978 165.989,124.943
  SIG/PWR2 w0.2: v1(164.617,116.053) 164.617,119.304 v1(165.379,120.066) ; P7.2@181.559,92.403 181.635,92.479 v1(181.635,98.171)
NetC64_2: C64.2 R56.2 U11.81 | length 7.3
  SIG/PWR1 w0.2: U11.81@157.963,125.784 157.963,125.12 158.493,124.59 160.906,124.59 161.671,123.825 R56.2@161.671,123.139 C64.2@161.671,121.437
NetC65_2: C65.2 R57.2 U11.83 | length 10.9
  SIG/PWR1 w0.2: U11.83@158.763,125.784 158.763,125.314 159.109,124.968 161.855,124.968 162.828,123.995 164.44,123.995 164.45,124.005 166.037,124.005 166.154,123.888 R57.2@166.154,123.139 166.154,121.526 C65.2@166.192,121.488
NetC81_2: C81.2 R65.1 SW6.2 SW7.2 SW8.2 SW9.2 SW10.2 TP21.1 U11.79 | length 74.2
  SIG/PWR1 w0.2: R65.1@157.035,121.768 157.035,123.317 157.048,123.33 v1(157.048,124.562) 157.048,124.67 157.163,124.784 U11.79@157.163,125.784 ; v1(168.25,126.949) 168.783,126.949 169.342,126.39 172.085,126.39 172.847,125.628 172.847,122.555 ; TP21.1@174.854,122.453 174.752,122.555 172.847,122.555 ; v1(186.157,98.374) 186.157,98.476 172.847,111.785 172.847,122.555
  SIG/PWR2 w0.2: v1(157.048,124.562) 157.048,125.07 159.69,127.711 161.849,127.711 162.433,127.127 167.348,127.127 167.525,126.949 168.072,126.949 v1@168.25,127.127 ; v1(186.157,98.374) 198.196,98.374 200.762,95.809 SW10.2@200.762,94.488
NetC84_2: C84.2 Q7.1 R70.1 SW4.2 TP20.1 | length 136.6
  SIG/PWR1 w0.2: v1@132.836,106.751 134.66,104.927 152.225,104.927 157.398,99.754 157.398,87.682 159.866,85.214 201.724,85.214 214.598,98.088 220.783,98.088 v1(221.31,97.561) ; TP20.1@133.934,125.4 135.89,123.444 C84.2@135.89,122.606 R70.1@135.89,120.853 ; v1(135.992,119.685) 135.992,120.752 R70.1@135.89,120.853 ; Q7.1@137.386,120.853 R70.1@135.89,120.853
  SIG/PWR2 w0.2: v1(132.842,106.756) 129.667,109.931 129.667,113.36 v1(135.992,119.685) ; v1(221.31,97.561) 221.31,95.936 SW4.2@221.361,95.885
NetD1_2: D1.2 L2.1 U2.1
NetD2_2: D2.2 R17.1 | length 2.1
  SIG/PWR1 w0.2: R17.1@155.524,197.183 D2.2@155.524,199.276
NetD3_2: D3.2 L6.2 U7.4 U7.5
NetD9_2: D9.2 R39.2 | length 2.6
  SIG/PWR2 w0.254: D9.2@106.528,91.34 R39.2@106.528,93.955
NetD10_2: D10.2 R26.2 | length 4
  SIG/PWR1 w0.2: R26.2@249.466,118.643 249.756,118.933 250.936,118.933 251.998,119.994 251.998,120.857 D10.2@252.019,120.877
NetD11_2: D11.2 R28.2 | length 2.1
  SIG/PWR1 w0.2: R28.2@205.88,110.642 207.9,110.642 D11.2@207.924,110.618
NetD12_2: D12.2 R29.2 | length 2.2
  SIG/PWR1 w0.2: D12.2@216.129,139.168 218.174,139.168 R29.2@218.3,139.294
NetJ1_3: J1.3 P1.1
NetL3_2: L3.2 U3.11
NetL4_2: L4.2 U3.6
NetL5_2: L5.2 U3.20
NetP7_1: P7.1 U11.88 | length 41.5
  SIG/PWR1 w0.2: U11.88@160.763,125.784 162.074,125.784 163.124,124.734 v1(163.124,124.649)
  SIG/PWR1 w0.254: v1(163.728,115.926) 178.928,100.726 178.928,98.339 v1(178.994,98.273)
  SIG/PWR2 w0.254: v1(163.124,124.649) 163.627,124.146 163.627,119.992 163.881,119.738 163.881,116.172 163.728,116.019 v1(163.728,115.926) ; P7.1@178.994,92.713 v1(178.994,98.273)
NetP7_3: P7.3 U11.1 | length 45.5
  SIG/PWR1 w0.2: U11.1@161.438,126.459 162.213,126.459 162.742,125.93 163.806,125.93 164.986,124.75 v1(164.986,124.746) ; v1(165.467,116.14) 183.348,98.259 184.139,98.259 v1(184.15,98.247)
  SIG/PWR2 w0.2: v1(164.986,124.746) 166.091,123.641 166.091,119.837 165.467,119.214 v1(165.467,116.14) ; P7.3@184.099,92.403 184.15,92.454 v1(184.15,98.247)
NetQ1_1: Q1.1 R2.1 R6.2 | length 7.1
  SIG/PWR2 w0.254: Q1.1@245.532,98.23 245.518,98.216 244.799,98.216 244.551,97.968 244.551,94.894 245.011,94.435 245.62,94.435 R2.1@245.668,94.386 R6.2@245.668,92.786
NetQ2_1: Q2.1 R3.1 R7.2 | length 7.2
  SIG/PWR2 w0.254: Q2.1@241.747,98.28 240.89,98.28 240.741,98.132 240.741,94.844 241.198,94.386 R3.1@241.858,94.386 R7.2@241.858,92.888
NetQ4_1: Q4.1 R31.1 U7.27 | length 24.4
  SIG/PWR1 w0.2: v1(230.378,114.148) 230.378,114.763 231.221,115.606 231.873,115.606 U7.27@231.998,115.731 ; R31.1@239.471,107.975 240.107,107.975 240.452,107.63 240.452,107.122 v1(240.528,107.045)
  SIG/PWR1 w0.254: Q4.1@237.549,107.381 237.661,107.493 238.481,107.493 238.789,107.801 239.298,107.801 R31.1@239.471,107.975
  SIG/PWR2 w0.254: v1(230.378,114.148) 229.946,113.716 229.946,109.626 234.34,105.232 238.715,105.232 v1(240.528,107.045)
NetQ5_1: Q5.1 R41.2 R42.1
NetQ5_3: Q5.3 R41.1 USB1.A4 USB1.B4
NetQ6_1: Q6.1 R50.2 R51.1
NetQ6_3: Q6.3 R50.1 USB2.A4 USB2.B4
NetR1_1: R1.1 R4.2 U1.3
NetR18_2: R18.2 U5.94 | length 3
  SIG/PWR1 w0.2: R18.2@127.737,171.399 127.737,171.348 U5.94@129.787,169.297
NetR21_1: R21.1 U5.37 | length 2.9
  SIG/PWR1 w0.2: U5.37@142.515,160.105 143.891,158.729 143.891,158.674 R21.1@144.526,158.039
NetR33_1: R33.1 R35.2 U7.14 | length 4.1
  SIG/PWR1 w0.2: R33.1@236.537,127.139 R35.2@236.537,125.565 236.537,125.54 237.798,124.279 U7.14@237.798,123.531